# Altium PCB IO BOARD CERES V3.PcbDoc
Units mm, origin at the board's own origin, x right, y up, seen from the top; angles counter-clockwise.
Board outline 82 x 99.2 mm, 2 copper layers (Top Layer, Bottom Layer), stack 1.671 mm thick; 68 components, 45 nets, 223 pads, 57 vias.
Unrouted connection lines stored in the file: 1.
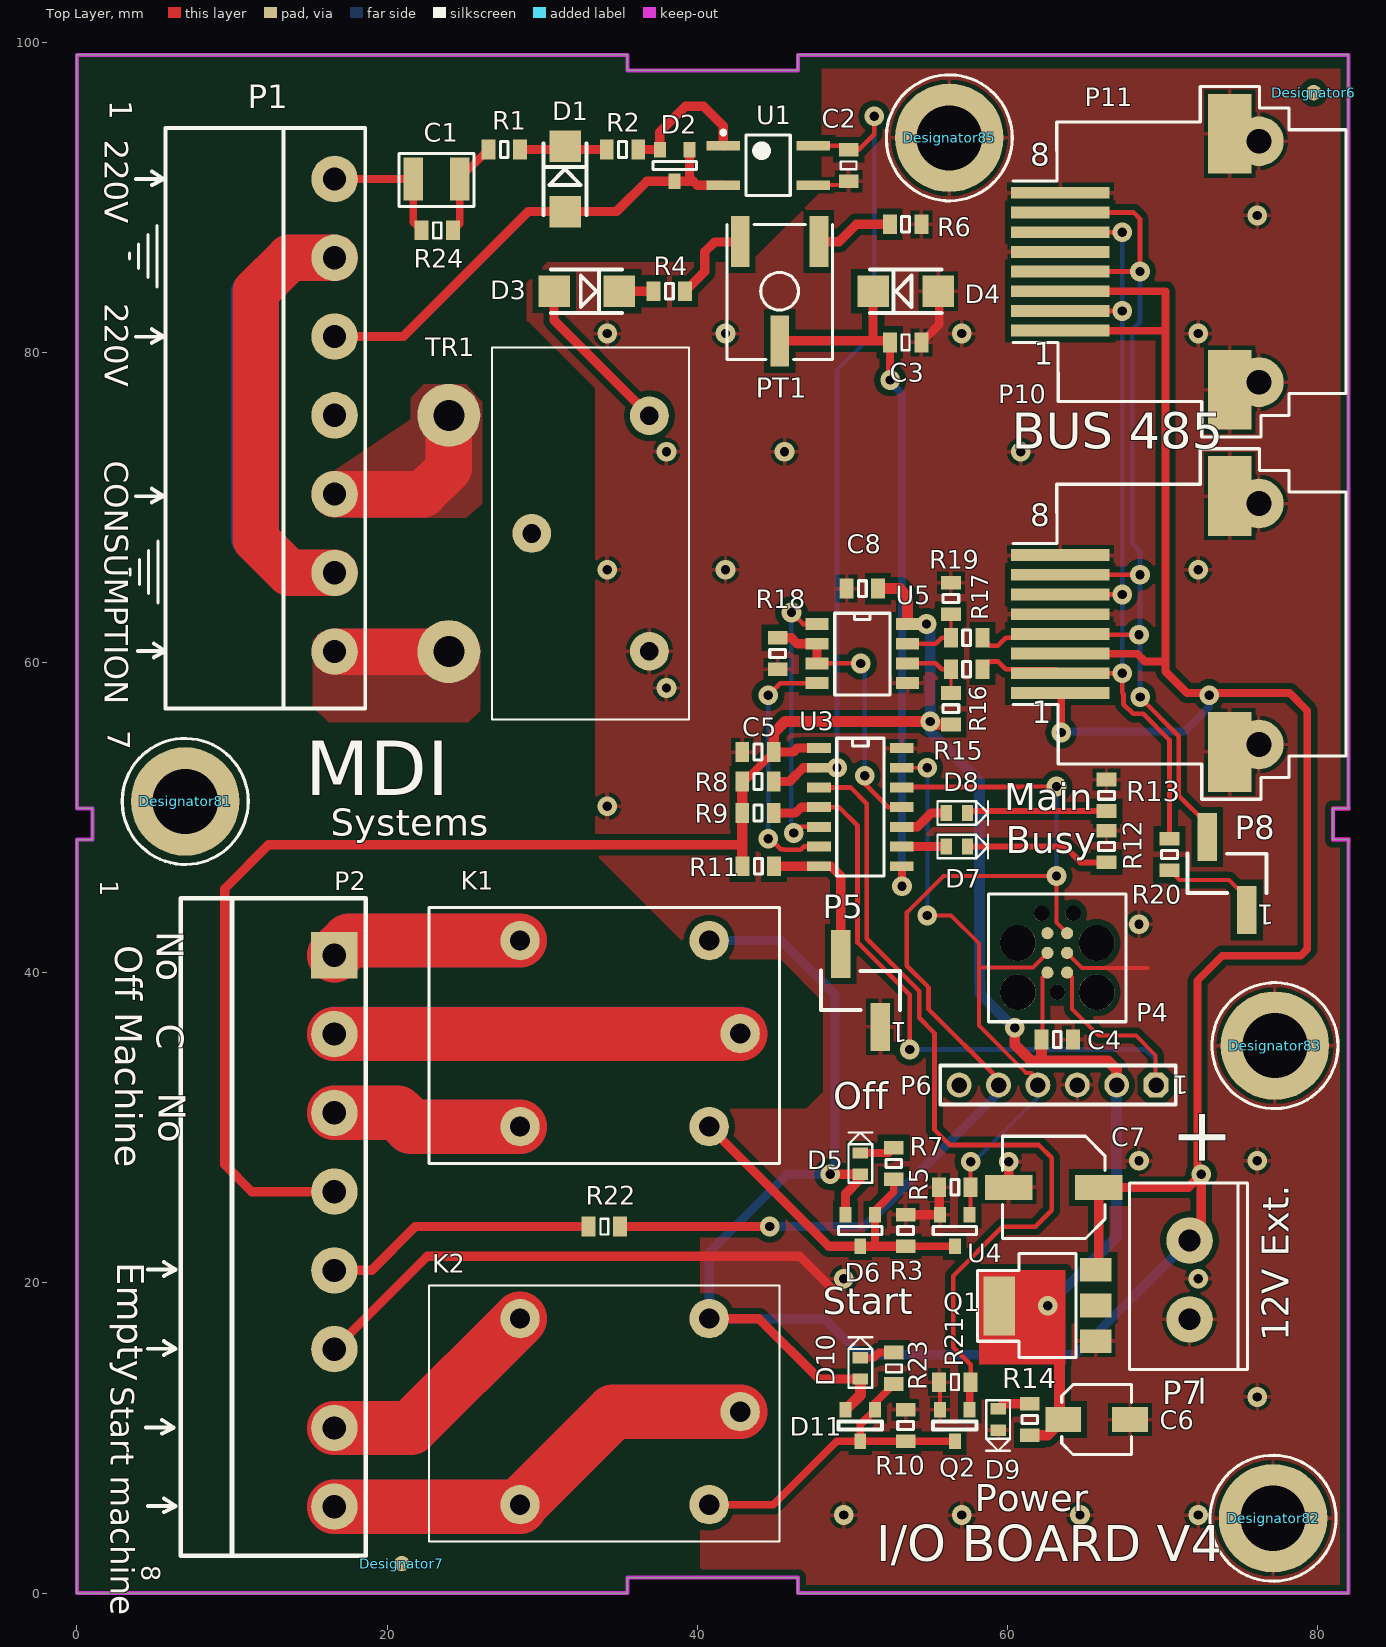
[diagram p0: Top Layer view]
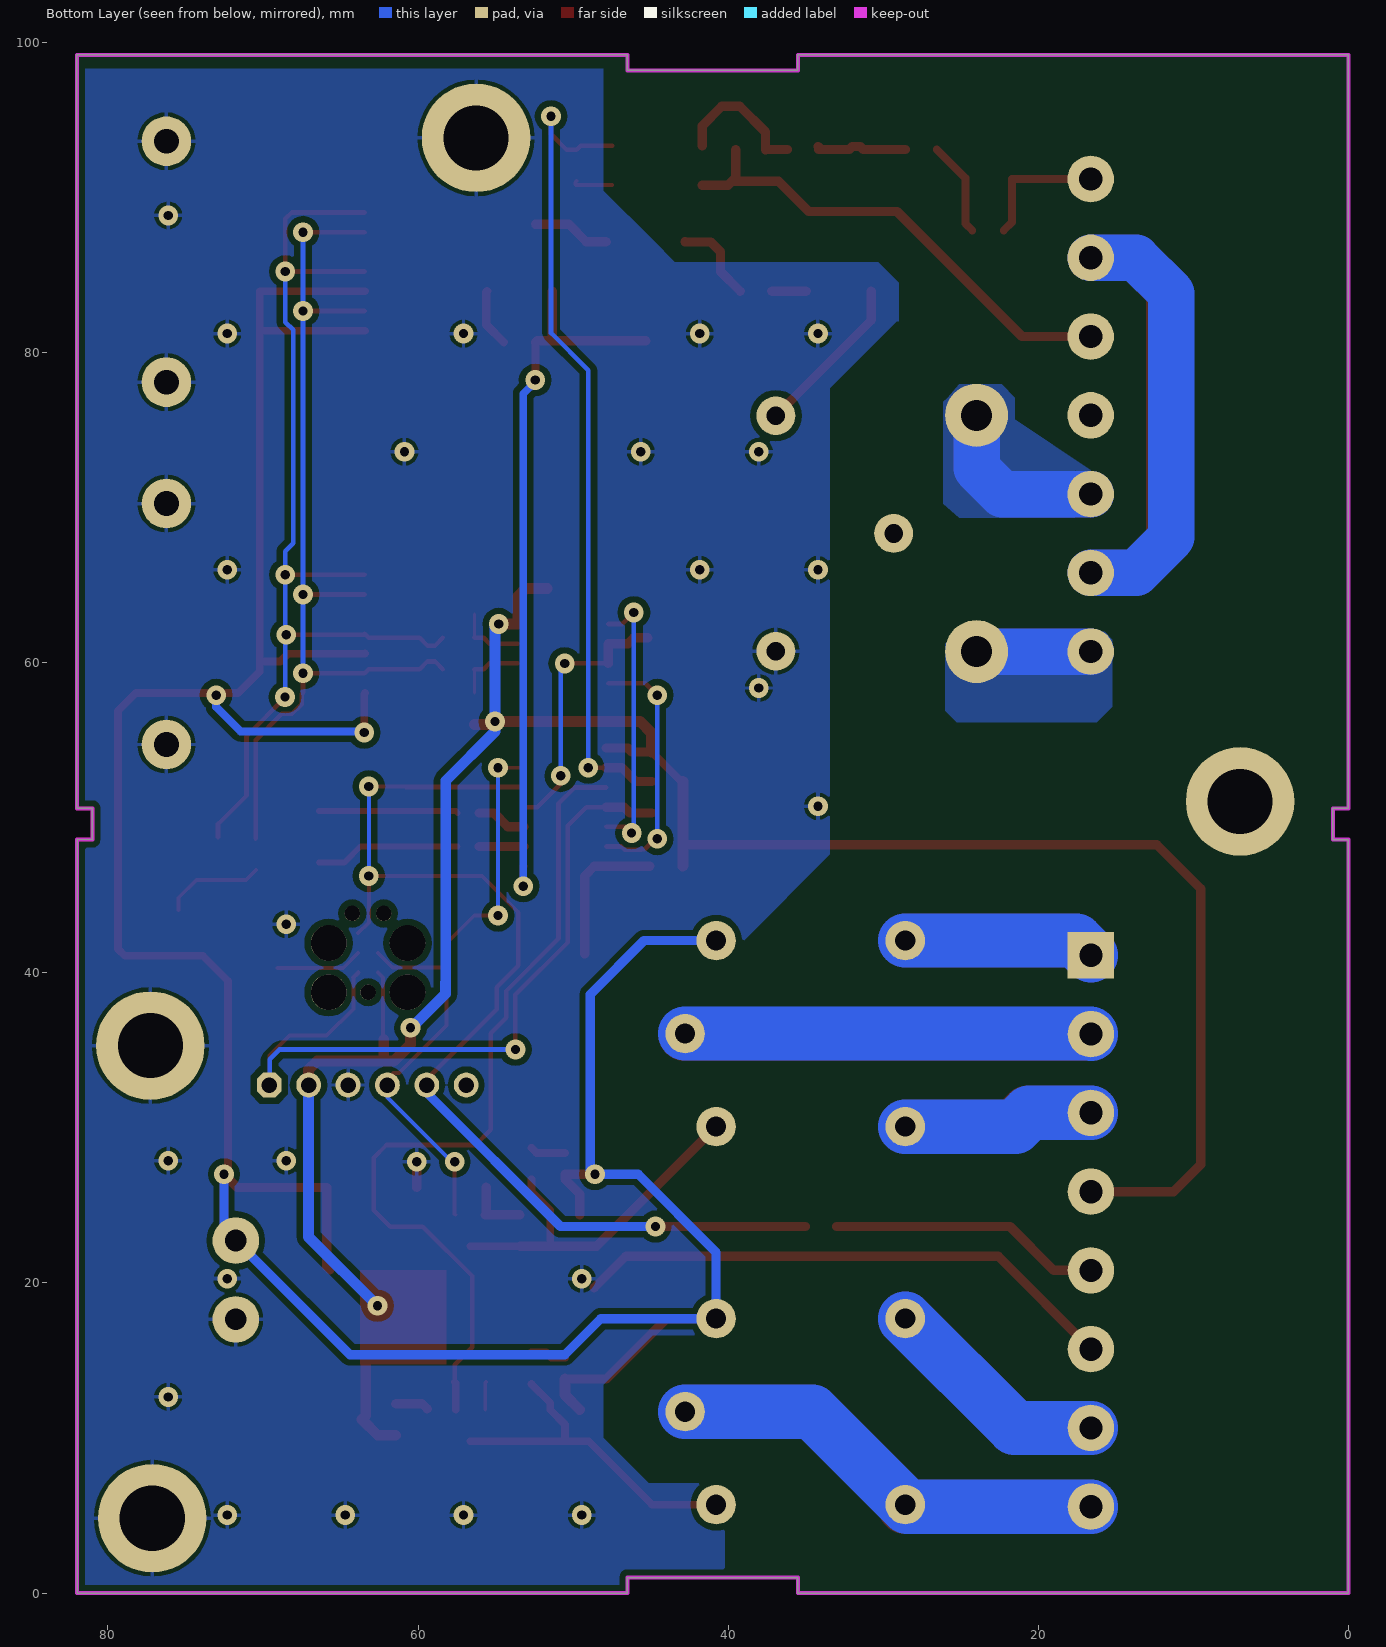
[diagram p1: Bottom Layer view, seen from below]
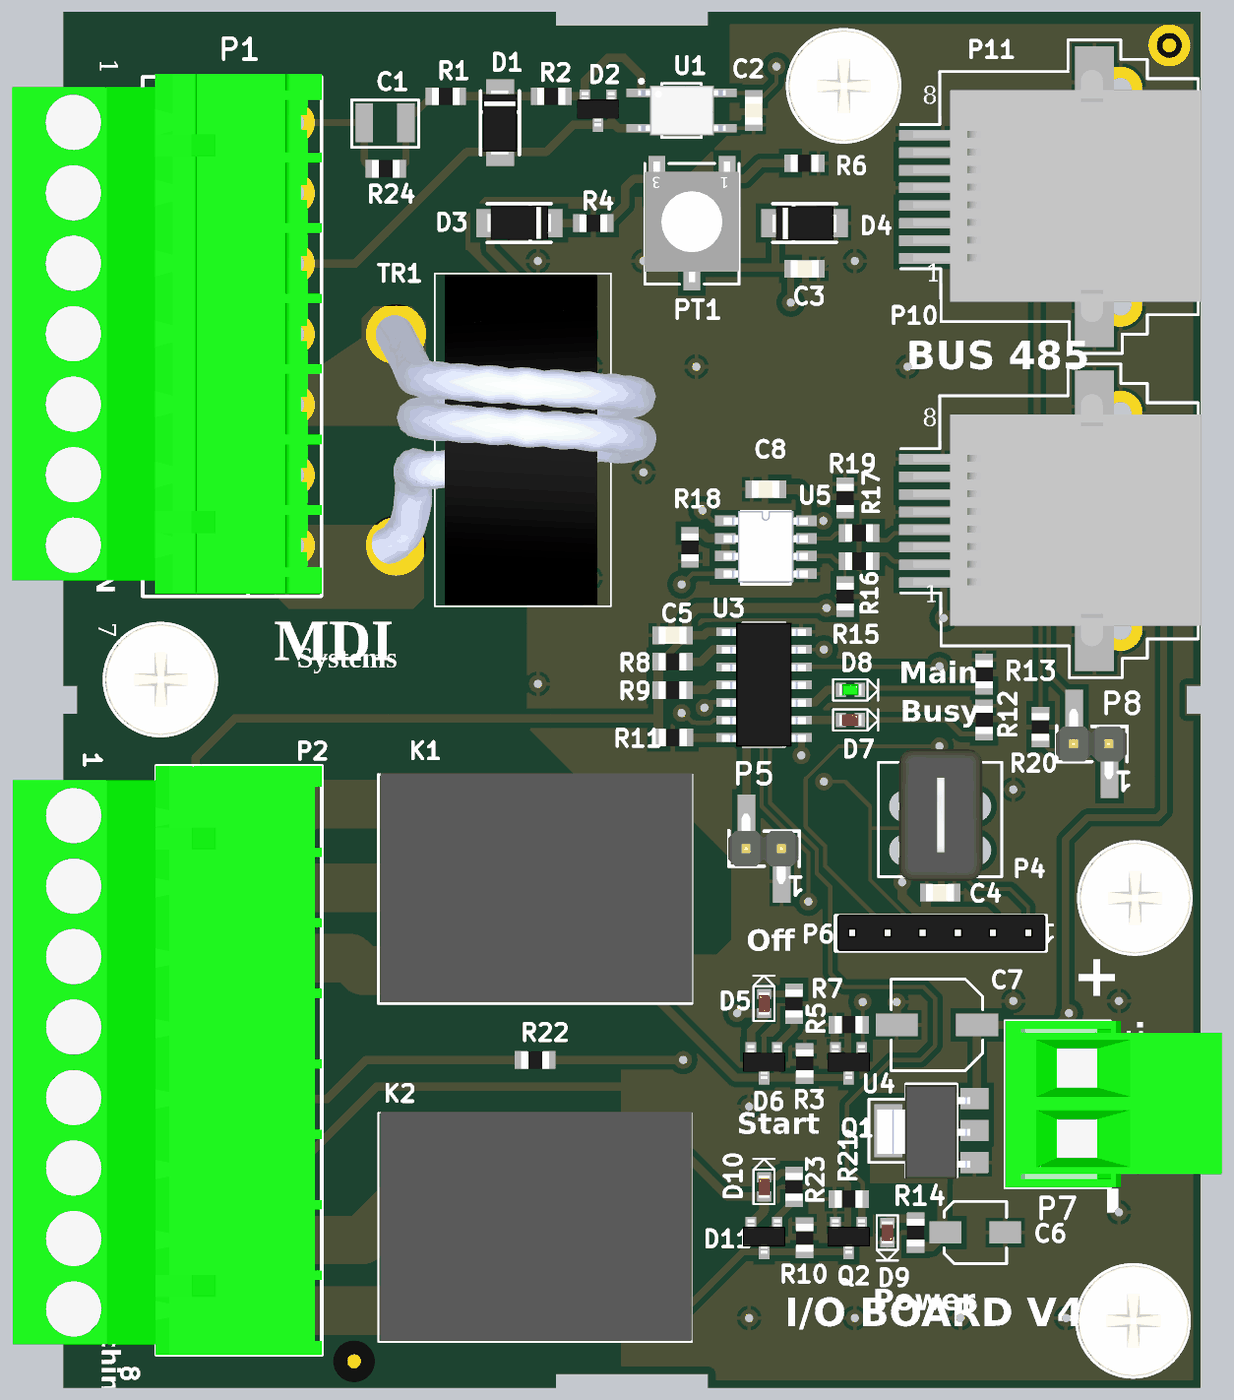
[diagram p2: 3D render of the assembled board from above, using the file's embedded part models]

## Layer stack, top to bottom
Top Solder: solder mask 0.0102, Solder Resist, Dk 3.5
Top Layer: signal copper 0.0356
Dielectric1: core 1.6, FR-4, Dk 4.8
Bottom Layer: signal copper 0.0356
Bottom Solder: solder mask 0.0102, Solder Resist, Dk 3.5

## Board outline
0,0 0,48.6 1,48.6 1,50.6 0,50.6 0,99.2 35.5,99.2 35.5,98.2 46.5,98.2 46.5,99.2 82,99.2 82,50.6 81,50.6 81,48.6 81.996,48.603 81.996,0 46.5,0 46.5,1 35.5,1 35.5,0

## Design rules (kind name [scope] priority, off if disabled: settings)
Clearance Clearance_2 [InPolygon vs InNet('TERRE')] p1: gap=2
Clearance Clearance_1 [InPolygon] p2: gap=0.4
Clearance [All] p3: gap=0.3
DiffPairsRouting [All] p1: maxlimit=0.3 minlimit=0.3 mostfreqgap=0.3 toplayer_minwidth=0.3 toplayer_maxwidth=0.3 toplayer_prefwidth=0.3 bottomlayer_minwidth=0.3 bottomlayer_maxwidth=0.3 bottomlayer_prefwidth=0.3 maxuncoupledlength=12.7
FabricationTestPointUsage TestPointUsage [All] p1: valid=0 allowmultiple=FALSE
FabricationTestpoint Testpoint [All] p1: side=3 testpointundercomponent=TRUE minsize=1.016 maxsize=2.54 preferedsize=1.524 minholesize=0 maxholesize=1.016 preferedholesize=0.813 testpointgrid=0.025 allowsidetop=TRUE allowsidebottom=TRUE usegrid=TRUE gridtolerance=0
HoleSize [All] p1: absolutevalues=TRUE maxlimit=5 minlimit=0.025 maxpercent=80.000 minpercent=20.000
MinimumSolderMaskSliver [All] p1: minsoldermaskwidth=0
PolygonConnect PolygonConnect_1 [All vs (InNet('NetP1_7') or InNet('NetP1_5'))] p1: connectstyle=Direct reliefconductorwidth=0.254 reliefentries=4 polygonreliefangle="90 Angle" airgapwidth=0.254
PolygonConnect [All] p2: connectstyle=Relief reliefconductorwidth=0.254 reliefentries=4 polygonreliefangle="90 Angle" airgapwidth=0.254
RoutingVias [All] p1: holewidth=0.6 width=1.27 viastyle="Through Hole" minholewidth=0.5 minwidth=1.27 maxholewidth=0.9 maxwidth=1.35
SMDNeckDown [All] p1: percent=100.000
SilkToSilkClearance [All] p1: silktosilkclearance=0.1
SilkToSolderMaskClearance SilkscreenOverComponentPads [IsPad] p1: minsilkscreentomaskgap=0.1 clearancetoexposedcopper=TRUE
SolderMaskExpansion [All] p1: expansion=0
Width "Schematic Width Constraint" [InNet('GND')] p1: maxlimit=2 minlimit=0.254 preferedwidth=0.55
Width Width_3 [InNet('+5')] p2: maxlimit=2 minlimit=0.254 preferedwidth=0.7
Width Width_2 [InNet('3.3')] p3: maxlimit=2 minlimit=0.254 preferedwidth=0.7
Width Width_1 [InNet('+12')] p4: maxlimit=2 minlimit=0.254 preferedwidth=0.7
Width [All] p5: maxlimit=6 minlimit=0.254 preferedwidth=0.6
23 further rules are at their usual default settings.

## Classes and differential pairs
component class "U_MCU IO": C4 C5 C6 C7 D7 D8 D9 P4 P5 P6 P7 R8 R9 R11 R12 R13 R14 U3 U4
component class U_IO: C1 C2 C3 D1 D2 D3 D4 D5 D6 D10 D11 K1 K2 P1 P2 PT1 Q1 Q2 R1 R2 R3 R4 R5 R6 R7 R10 R21 R22 R23 R24 TR1 U1
component class "U_RS485 IO": C8 P8 P10 P11 R15 R16 R17 R18 R19 R20 U5
differential pair D: +D_P -D_N
differential pair D1: +D1_P -D1_N

## Components (designator, comment, footprint, x,y, rotation, side; value= is the part's Value field where it differs from the comment)
C1 "150nF" C1210 23.196,91.199 r0 top
C2 "10uF" C0805 49.772,92.075 r270 top
C3 "10uF" C0805 53.446,80.658 r0 top
C4 "100nF" C0805 63.225,35.7 r180 top
C5 "100nF" C0805 43.921,54.242 r0 top
C6 "10uF" KEMET_4 65.765,11.189 r0 top
C7 "100uF" KEMET_63 62.992,26.162 r180 top
C8 "100nF" C0805 50.652,64.783 r180 top
D1 "BZG03C12" sma 31.477,91.199 r90 top
D2 "BAT54S" SOT23 38.549,92.075 r0 top
D3 "1N4007" SMA 32.872,83.96 r0 top
D4 "BZG05C5V1" SMA 53.446,83.96 r180 top
D5 "HSMH-C190" 0603-LEDR 50.525,27.699 r90 top
D6 "BAT54S" SOT23 50.525,23.381 r0 top
D7 "HSMH-C190" 0603-LEDR 56.748,48.146 r0 top
D8 "HSMH-C190" 0603-LEDV 56.748,50.305 r0 top
D9 "HSMH-C190" 0603-LEDR 59.415,11.189 r270 top
D10 "HSMH-C190" 0603-LEDR 50.525,14.491 r90 top
D11 "BAT54S" SOT23 50.525,10.808 r0 top
Designator6 "Comment" mire 79.756,96.774 r90 top
Designator7 "Comment" mire 20.955,1.905 r90 top
Designator81 "Comment" vis42 6.985,51.054 r0 top
Designator82 "Comment" vis42 77.141,4.826 r0 top
Designator83 "Comment" vis42 77.264,35.306 r0 top
Designator85 "Comment" vis42 56.261,93.853 r0 top
K1 "RELAY NAISJS" RELAIG5L 42.778,36.081 r180 top
K2 "RELAY NAISJS" RELAIG5L 42.778,11.697 r180 top
P1 "Header 7" CO7P508-90 16.616,91.199 r270 top locked
P2 "Header 8" "CO8P508 - 90°" 16.6,41.13 r270 top locked
P4 "ICSP1" TC2030 63.225,38.748 r90 top
P5 "CLR" M20_1X2 50.53,38.862 r180 top
P6 "ICSP2" 6SIP100 69.596,32.766 r180 top
P7 "Alim 12V ext." CO2P508 71.755,17.653 r90 top
P8 "EIA-485 TERMINAISON" M20_1X2 74.168,46.413 r180 top
P10 "RJ45" AMPHENOL-RJ45_8 69.829,62.497 r180 top
P11 "RJ45" AMPHENOL-RJ45_8 69.829,85.865 r180 top
PT1 "100K" 3361P 45.318,83.96 r180 top
Q1 "2N7002" SOT23 56.621,23.381 r0 top
Q2 "2N7002" SOT23 56.621,10.808 r0 top
R1 "470" R0805 27.559,93.104 r180 top
R2 "1K" R0805 35.179,93.104 r0 top
R3 "56K" R0805 53.446,23.381 r270 top
R4 "220" R0805 38.206,83.96 r180 top
R5 "56K" R0805 56.621,26.175 r0 top
R6 "220" R0805 53.446,88.278 r180 top
R7 "1K" R0805 52.684,27.699 r90 top
R8 "56K" R0805 43.921,52.337 r180 top
R9 "56K" R0805 43.921,50.305 r180 top
R10 "56K" R0805 53.446,10.808 r270 top
R11 "56K" R0805 43.942,46.876 r180 top
R12 "220" R0805 66.4,48.146 r270 top
R13 "220" R0805 66.4,51.448 r270 top
R14 "270" R0805 61.447,11.189 r270 top
R15 "4.7K" R0805 56.367,57.036 r270 top
R16 "56" R0805 57.383,59.576 r0 top
R17 "56" R0805 57.383,61.608 r0 top
R18 "1K" R0805 45.191,60.592 r90 top
R19 "4.7K" R0805 56.367,64.148 r270 top
R20 "120" R0805 70.464,47.638 r90 top
R21 "56K" R0805 56.621,13.602 r0 top
R22 "1K" R0805 34.015,23.635 r180 top
R23 "1K" R0805 52.684,14.491 r90 top
R24 "1M" R0805 23.241,87.884 r180 top
TR1 "AC1010" TR-AC10XX 33.126,68.339 r90 top
U1 "HCPL-181" OPTO-4PIN 44.577,92.075 r0 top
U3 "PIC16F1824" SO-14 50.525,50.686 r0 top
U4 "LM1117DT-5.0" SOT223 62.59,18.542 r90 top
U5 "ADM4851ARZ" SOIC8 50.652,60.592 r0 top

## Footprints (in the part's own frame and the unit in brackets; to place one, negate y for a bottom-side part, rotate by r counter-clockwise, add the part's x,y. Pads: shape width x height; smd on the part's side, far side on the other; paste and mask are expansions set on the pad)
6SIP100 [mm]
  oct 1.6x1.6 hole 1: 1(0,0)
  round 1.6 hole 1: 2(2.54,0) 3(5.08,0) 4(7.62,0) 5(10.16,0) 6(12.7,0)
  silkscreen extent -1.27,-1.27 13.92,1.27, body extent -1.24,-1.33 13.76,1.27, height 9.62
0603-LEDR [mm]
  rect 0.725x1.016 smd paste+0 mask+0: 1(-0.69,0) 2(0.69,0)
  silkscreen extent -1.24,-0.76 2.01,0.76, body extent -0.8,-0.4 0.8,0.4, height 0.69
0603-LEDV [mm]
  rect 0.725x1.016 smd: 1(-0.69,0) 2(0.69,0)
  silkscreen extent -1.24,-0.76 2.01,0.76, body extent -0.8,-0.4 0.8,0.4, height 0.69
3361P [mm] "Résistance ajustable Bourns"
  rect 1.2x3.3 smd: 1(-2.54,-3.2) 2(0,3.2) 3(2.54,-3.2)
  silkscreen extent -3.4,-4.3 3.4,4.4, body extent -3.4,-4.45 3.4,4.25, height 4.88
AMPHENOL-RJ45_8 [mm]
  rect 6.35x0.76 smd: 1(6.4,4.445) 2(6.4,3.175) 3(6.4,1.905) 4(6.4,0.635) 5(6.4,-0.635) 6(6.4,-1.905) 7(6.4,-3.175) 8(6.4,-4.445)
  round 3.2 hole 1.6: 9(-6.4,7.77) 9(-6.4,-7.77)
  rect 2.8x5.15 smd: 9(-4.524,8.255) 9(-4.524,-8.255)
  silkscreen extent -12.02,-11.3 9.45,11.3, body extent -12.22,-9.14 8.56,9.05, height 11.85
C0805 [mil]
  rect 35x50 smd: 1(-40,0) 2(40,0)
  silkscreen extent -10,-20 10,20, body extent -39,-25 40,25, height 56
C1210 [mm]
  rect 1.27x2.8 smd paste+0 mask+0: 1(-1.5,0)
  rect 1.27x2.8 smd mask+0: 2(1.5,0)
  silkscreen extent -2.41,-1.78 2.41,1.65, body extent -1.52,-1.27 1.52,1.27, height 1
CO2P508 [mm]
  round 3 hole 1.4: 1(0,0) 2(5.08,0)
  silkscreen extent -3.23,-3.75 8.79,3.86, body extent -3.2,-11.79 8.78,3.86, height 22.32
CO7P508-90 [mm]
  round 3 hole 1.5: 1(0,0) 2(5.08,0) 3(10.16,0) 4(15.24,0) 5(20.32,0) 6(25.4,0) 7(30.48,0)
  silkscreen extent -3.3,-10.91 34.14,1.98, body extent -3.51,-20.3 33.93,2, height 15.56
"CO8P508 - 90°" [mm]
  rect 3x3 hole 1.5: 1(0,0)
  round 3 hole 1.5: 2(5.08,0) 3(10.16,0) 4(15.24,0) 5(20.32,0) 6(25.4,0) 7(30.48,0) 8(35.56,0)
  silkscreen extent -3.68,-9.91 38.73,2.03, body extent -3.7,-20.27 38.76,2.03, height 15.39
KEMET_4 [mm] "Aluminum Electrolytic Capacitor, Body 4,30x4,30x6,10mm, IPC Medium Density"
  rect 2.3x1.6 smd: 1(-2.15,0) 2(2.15,0)
  silkscreen extent -2.25,-2.25 2.25,2.25, body extent -2.6,-2.25 2.6,2.25, height 4.7
KEMET_63 [mm] "Aluminum Electrolytic Capacitor, Body 6,50x6,50x6,10mm, IPC Medium Density"
  rect 3.05x1.6 smd: 1(-2.9,0) 2(2.9,0)
  silkscreen extent -3.3,-3.3 3.3,3.3, body extent -3.49,-3.39 3.51,3.41, height 8.8
M20_1X2 [mm] "Connecteur Harwin_M20-8770242"
  rect 1.27x3.1 smd: 1(-1.27,2.35) 2(1.27,-2.35)
  silkscreen extent -2.54,-1.3 2.54,1.27, body extent -2.5,-2.54 2.58,2.54, height 9.95
mire [mm]
  round 1 smd paste-1 mask+1: Mire(0,0)
OPTO-4PIN [mm] "SOP, 4-Leads, Body 3,60x4,40mm, Pitch 2,54mm, IPC Medium Density"
  rect 2.15x0.6 smd: 1(-2.9,1.27) 2(-2.9,-1.27) 3(2.9,-1.27) 4(2.9,1.27)
  silkscreen extent -3.02,-1.95 1.42,2.24, body extent -3.13,-1.8 3.17,1.8, height 2.2
R0805 [mil]
  rect 35x50 smd: 1(-40,0) 2(40,0)
  silkscreen extent -10,-20 10,20, body extent -39,-24 39,25, height 20
RELAIG5L [mm]
  round 2.54 hole 1.3: 1(0,0) 2(2,-6) 3(14.2,-6) 4(14.2,6) 5(2,6)
  silkscreen extent -2.54,-8.13 20.07,8.38, body extent -2.57,-8.2 19.93,8.3, height 19
sma [mil]
  rect 80x80 smd: 1(-82.7,0) 2(82.7,0)
  silkscreen extent -91,-55 90,55, body extent -91,-47 91,49, height 86
SMA [mil]
  rect 80x80 smd: 1(-82.7,0) 2(82.7,0)
  silkscreen extent -91,-55 90,55, body extent -91,-47 91,49, height 86
SO-14 [mil]
  rect 60x25 smd: 1(-105,150) 2(-105,100) 3(-105,50) 4(-105,0) 5(-105,-50) 6(-105,-100) 7(-105,-150) 8(105,-150) 9(105,-100) 10(105,-50) 11(105,0) 12(105,50) 13(105,100) 14(105,150)
  silkscreen extent -60,-175 60,175, body extent -120,-176 119,176, height 69
SOIC8 [mil]
  rect 59.1x30.3 smd: 1(-115,75) 2(-115,25) 3(-115,-25) 4(-115,-75) 5(115,-75) 6(115,-25) 7(115,25) 8(115,75)
  silkscreen extent -70,-105 70,102, body extent -120,-100 119,103, height 69
SOT23 [mil]
  rect 30x40 smd: 1(37.5,40) 2(-37.5,40) 3(0,-40)
  silkscreen extent -55,-10 55,10, body extent -60,-45 60,53, height 47
SOT223 [mil]
  rect 60x80 smd: 1(-90.6,-122.5) 2(0,-122.5) 3(90.6,-122.5)
  rect 150x80 smd: 4(-0.6,122.5)
  silkscreen extent -132,-73 132,178, body extent -137,-111 129,154, height 73
TC2030 [mil]
  round 31 smd paste-39.37: 1(50,-25) 2(50,25) 3(100,-25) 4(100,25) 5(150,-25) 6(150,25)
  round 39 hole 39.37 unplated: 7(0,0) 8(200,-40) 9(200,40)
  round 90.55 hole 90.55 unplated: 10(0,-100) 11(125,-100) 12(0,100) 13(125,100)
  silkscreen extent -75,-175 250,175, body extent -87,-120 287,116, height 626
TR-AC10XX [mm]
  round 4.064 hole 2 mask+0.127: 1(7.62,9.144) 2(-7.62,9.144)
  round 2.5 hole 1.2 mask+0.127: 3(-7.593,-3.796) 4(7.593,-3.796) 5(0,3.796)
  silkscreen extent -11.99,-6.35 11.99,6.35, body extent -11.91,-9.63 11.89,10.89, height 29.76
vis42 [mm]
  round 7 hole 4.2: 1(0,0)
  silkscreen extent -4.06,-4.06 4.06,4.06, body extent -3.97,-4 4.03,4, height 3.09

## Part data
C1: library part Cap, "Capacitor"
C2 C3 C7: library part "Cap Pol 100uF", "Polarized Capacitor"
C4 C5 C8: library part "Cap 0805 100nF", "Capacitor"
C6: library part "Cap Pol1", "Polarized Capacitor"
D1: library part DZ
D2 D6 D11: "Schottky Barrier Double Diode"
D3: library part D
D4: "Silicon Zener Diode (3W)"
D5 D7 D8 D9 D10: "Surface Mount Chip LED, Red"
P1: "Header, 7-Pin"
P2: "Header, 8-Pin"
P4 P6: library part "Header 6", "Header, 6-Pin"
P5 P7 P8: library part "Header 2", "Header, 2-Pin"
P10 P11: library part "Header 8", "Header, 8-Pin"
PT1: library part RV
Q1 Q2: "N-channel Enhancement Mode Field-effect Transistor"
R1 R24: library part "Resistor 0805 470", "Resistor"
R2: library part Res2, "Resistor"
R3 R5 R8 R9 R10 R11 R21: library part "Resistor 0805 56K", "Resistor"
R4 R6 R12 R13: library part "Resistor 0805 220", "Resistor"
R7 R14 R18 R22 R23: library part "Resistor 0805 1K", "Resistor"
R15 R19: library part "Resistor 0805 4.7K", "Resistor"
R16 R17: library part "Resistor 0805 56", "Resistor"
R20: library part "Resistor 0805 120", "Resistor"
U1: library part Optoisolator1, "4-Pin Phototransistor Optocoupler"
U3: library part PIC16(L)F1824, "14 Pin Flash Microcontrollers with XLP Technology"
U4: "800mA Low-Dropout Linear Regulator, 3-pin TO-252"
U5: library part MAX485ESA, "Low-Power, Slew-Rate-Limited RS-485/RS-422 Transceiver"

## Free pads (board coordinates)
  round 6 on Top Paste: 1(-53.976,-74.879) 1(-53.976,45.121) 1(-53.976,165.121) 1(-18.941,-99.379) 1(-18.941,189.621) 1(101.059,-99.379) 1(101.059,189.621) 1(136.024,-74.879) 1(136.024,165.121) 1(136.095,45.121)

## Via types
v1: diameter 1.27, hole 0.6, Top Layer to Bottom Layer, 57 vias

## Nets (pads, with @x,y where several pads share a name; then routed paths per layer and width w, separated by ;. In a path a pad name is that pad's centre, name@x,y a point inside that pad or via, vN(x,y) a via of type N, cw(c..) or ccw(c..) an arc to the next point about the centre after c; other vN are vias at no path point)
+5: C4.2 C5.2 C6.1 C8.1 P2.4 P4.2 P6.2 R8.2 R9.2 R11.2 R14.2 R15.2 U3.1 U4.4 U5.8 | length 163.9
  Top Layer w0.254: C4.2 62.262,35.753 62.262,39.69 P4.2
  Top Layer w0.5: R8.2 43.032,52.337 C5.2
  Top Layer w0.6: P2.4 11.279,25.89 9.525,27.644 9.525,45.425 12.36,48.26 42.905,48.26 ; C5.2 46.207,54.242 46.461,54.496 U3.1
  Top Layer w0.7: R8.2 R9.2 42.905,48.26 42.905,46.897 R11.2 ; C5.2 44.937,55.476 45.675,56.215 v1(55.038,56.215) 55.232,56.02 R15.2 ; C8.1 53.065,64.783 53.573,64.275 U5.8 v1(54.797,62.497) ; U4.4 U4.4@60.144,18.527 ; v1(60.484,36.45) 60.484,35.375 61.545,34.314 62.209,34.314 ; R14.2 62.599,10.173 C6.1 63.373,11.431 63.373,15.298 U4.4@60.144,18.527 ; C4.2 62.209,34.314 ; v1(62.611,18.527) U4.4@60.144,18.527 ; P6.2 67.056,33.761 66.503,34.314 62.209,34.314
  Bottom Layer w0.7: v1(54.797,62.497) 55.038,62.497 v1(55.038,56.215) 55.038,55.57 58.218,52.389 58.218,39.39 58.238,39.37 58.238,38.65 60.437,36.45 v1(60.484,36.45) ; v1(62.611,18.527) 67.056,22.972 P6.2
+12/485: C7.1 D5.1 D6.2 D10.1 D11.2 K1.2 K2.2 P7.2 P10.1 P10.3 P11.1 P11.3 U4.3 | length 215.4
  Top Layer w0.5: P10.1 63.476,58.005 v1(63.476,55.5) ; P10.3 63.441,60.58 68.392,60.58 68.888,60.084 70.21,60.084 ; P11.1 70.21,81.42 70.21,60.084 ; P11.3 70.21,83.96 70.21,81.42 ; v1(72.517,27.009) 72.263,27.263 72.263,39.497 73.875,41.109 78.921,41.109 79.354,41.542 79.354,56.909 78.211,58.052 71.591,58.052 70.21,59.433 70.21,60.084
  Top Layer w0.6: K2.2 43.973,17.697 47.869,13.801 D10.1 ; v1(48.585,27.009) D5.1 50.525,26.683 49.573,25.731 D6.2 ; U4.3 65.892,21.034 C7.1 71.67,26.162 v1(72.517,27.009) 72.517,23.495 P7.2
  Top Layer w0.7: D11.2 50.525,12.777 D10.1
  Bottom Layer w0.5: v1(63.476,55.5) 63.546,55.57 71.445,55.57 73.025,57.15 v1(73.025,57.912)
  Bottom Layer w0.6: K1.2 45.422,42.081 48.895,38.608 48.895,27.32 v1(48.585,27.009) 45.805,27.009 40.778,21.982 K2.2 48.216,17.697 50.546,15.367 64.389,15.367 P7.2 ; P7.2@71.7,22.788 72.517,23.604 v1(72.517,27.009)
\M\C\L\R\: P4.1 P6.1 R9.1 U3.4 | length 50.3
  Top Layer w0.254: 64.165,39.713 64.165,37.681 65.892,35.954 68.305,35.954 69.575,34.684 69.575,32.787 P6.1
  Top Layer w0.3: U3.4 49.15,50.686 50.345,49.491 50.345,41.956 53.721,38.579 v1(53.721,35.052) ; P4.1 64.165,39.713
  Top Layer w0.6: R9.1 46.334,50.305 46.715,50.686 U3.4
  Bottom Layer w0.3: v1(53.721,35.052) 68.94,35.052 69.575,34.417 P6.1@69.575,33.16
D1_N: R15.1 R16.1 U5.6 | length 4.5
  Top Layer w0.2: R15.1 R16.1
  Top Layer w0.3: U5.6 55.392,59.957 55.773,59.576 R16.1
D1_P: R17.1 R19.2 U5.7 | length 4.5
  Top Layer w0.2: R17.1 R19.2
  Top Layer w0.3: U5.7 55.392,61.227 55.773,61.608 R17.1
D_N: P10.2 P10.6 P11.2 P11.6 R16.2 R20.2 | length 62.3
  Top Layer w0.3: R16.2 58.907,60.084 59.392,60.084 59.9,59.576 63.175,59.576 P10.2 v1(67.416,59.322) 67.416,58.061 67.495,57.982 67.495,57.336 68.131,56.7 68.777,56.7 70.464,55.013 R20.2 ; P10.6 v1(67.416,64.402) ; P11.2 v1(67.416,82.69) ; P11.6 v1(67.416,87.77)
  Bottom Layer w0.3: v1(67.416,59.322) v1(67.416,64.402) v1(67.416,82.69) v1(67.416,87.77)
D_P: P8.2 P10.4 P10.7 P11.4 P11.7 R17.2 | length 68.3
  Top Layer w0.3: R17.2 58.907,61.1 59.392,61.1 59.9,61.608 63.175,61.608 P10.4 63.476,61.815 v1(68.501,61.815) ; P10.7 v1(68.559,65.672) ; P11.4 v1(68.559,85.23) 68.559,88.63 68.149,89.04 P11.7 ; v1@68.56,57.765 71.064,55.262 71.064,51.435 72.898,49.601 P8.2
  Bottom Layer w0.3: v1(68.559,85.23) 68.559,81.973 68.051,81.465 68.051,67.704 68.559,67.196 v1(68.559,65.672) 68.559,57.806 v1(68.58,57.785)
GND: C2.2 C3.2 C4.1 C5.1 C6.2 C7.2 C8.2 D4.1 D9.2 Designator81.1 Designator82.1 Designator83.1 Designator85.1 P2.6 P4.3 P5.1 P6.3 P7.1 P10.5 P10.8 P10.9 P11.5 P11.8 P11.9 Q1.2 Q2.2 R3.1 R5.1 R6.1 R10.1 R12.1 R13.1 R18.1 R19.1 R21.1 TR1.3 U1.3 U3.14 U4.1 U5.5 | length 54.9
  Top Layer w0.254: U1.3 49.805,90.805 49.844,90.843 49.844,90.987 C2.2 ; R21.1 55.669,13.539 Q2.2 ; P4.3 64.823,40.325 69.056,40.325
  Top Layer w0.55: C3.2 55.605,81.801 55.605,83.902 D4.1
  Top Layer w0.6: P2.6 22.587,21.717 46.609,21.717 48.641,19.685 ; R3.1 Q1.2 55.605,24.461 R5.1 ; C7.2 v1(60.092,27.81)
  other v1: 49.449,5.03 57.069,5.03 64.689,5.03 72.309,5.03 76.119,12.65 49.449,20.27 72.309,20.27 68.499,27.89 76.119,27.89 68.499,43.13 34.209,50.75 38.019,58.37 34.209,65.99 41.829,65.99 72.309,65.99 38.019,73.61 45.639,73.61 60.879,73.61 34.209,81.23 41.829,81.23 57.069,81.23 72.309,81.23 76.119,88.85
NetC1_1: C1.1 P1.1 R24.2 | length 8.6
  Top Layer w0.5: P1.1 C1.1 21.696,88.413 R24.2
NetC1_2: C1.2 R1.2 R24.1 | length 6.2
  Top Layer w0.5: R24.1 24.696,88.323 C1.2 24.696,91.257 R1.2
NetC2_1: C2.1 R8.1 U1.4 U3.2 | length 53.1
  Top Layer w0.3: U1.4 49.518,93.345 C2.1 50.425,93.091 51.422,94.088 v1(51.422,95.247) ; U3.2 v1(49.02,53.226)
  Top Layer w0.6: R8.1 45.953,52.337 46.842,53.226 U3.2
  Bottom Layer w0.3: v1(49.02,53.226) 49.02,78.865 51.422,81.267 v1(51.422,95.247)
NetC3_1: C3.1 D4.2 PT1.2 U3.8 | length 47.1
  Top Layer w0.5: C3.1 52.43,78.253 v1(52.451,78.232) ; U3.8 53.213,46.855 v1(53.213,45.593)
  Top Layer w0.6: PT1.2 51.478,80.76 ; D4.2 51.345,80.892 51.478,80.76 ; C3.1 52.328,80.76 51.478,80.76
  Bottom Layer w0.5: v1(52.451,78.232) 52.451,78.105 53.213,77.343 v1(53.213,45.593)
NetD1_1: D1.1 D2.1 D2.3 P1.3 U1.2 | length 31.5
  Top Layer w0.6: P1.3 21.048,81.039 29.108,89.098 D1.1 34.798,89.098 36.759,91.059 D2.3 39.751,91.059 ; D2.1 39.501,91.309 39.751,91.059 ; U1.2 40.005,90.805 39.751,91.059
NetD1_2: D1.2 R1.1 R2.1 | length 6
  Top Layer w0.6: R1.1 31.282,93.104 D1.2 32.004,93.3 32.2,93.104 R2.1 34.163,93.262 R2.1@34.2,93.3
NetD2_2: D2.2 R2.2 U1.1 | length 9.1
  Top Layer w0.6: R2.2 37.583,93.104 D2.2 37.596,94.233 39.248,95.885 40.407,95.885 41.677,94.615 U1.1
NetD3_1: D3.1 TR1.4 | length 10.6
  Top Layer w0.6: D3.1 30.771,82.083 TR1.4
NetD3_2: D3.2 R4.2 | length 2.2
  Top Layer w0.6: D3.2 R4.2
NetD5_2: D5.2 R7.2 | length 2.3
  Top Layer w0.5: D5.2 52.358,28.389 R7.2
NetD6_1: D6.1 D6.3 K1.5 Q1.3 R3.2 R7.1 | length 25.2
  Top Layer w0.5: D6.3 50.589,22.429 51.478,22.429 D6.1 51.478,24.684 52.684,25.89 R7.1 ; R3.2 Q1.3
  Top Layer w0.6: K1.5@41.179,30.081 K1.5 48.494,22.365 D6.3 R3.2
NetD7_1: D7.1 U3.9 | length 2.9
  Top Layer w0.6: U3.9 D7.1
NetD7_2: D7.2 R12.2 | length 9.4
  Top Layer w0.381: D7.2 63.72,48.146 64.736,47.13 R12.2
NetD8_1: D8.1 U3.10 | length 3.2
  Top Layer w0.6: U3.10 54.208,49.416 55.097,50.305 D8.1
NetD8_2: D8.2 R13.2 | length 9
  Top Layer w0.381: D8.2 57.565,50.432 R13.2
NetD9_1: D9.1 R14.1 | length 2.2
  Top Layer w0.6: D9.1 59.741,12.205 R14.1
NetD10_2: D10.2 R23.2 | length 2.3
  Top Layer w0.5: D10.2 51.406,15.181 51.732,15.507 R23.2
NetD11_1: D11.1 D11.3 K2.5 Q2.3 R10.2 R23.1 | length 22.1
  Top Layer w0.5: K2.5 44.906,5.697 49.001,9.792 D11.3 ; R23.1 51.478,12.269 D11.1 50.525,10.872 D11.3 ; Q2.3 R10.2 D11.3
NetK1_1: K1.1 P2.2 | length 52.4
  Top Layer w3.5: P2.2 K1.1@42.778,36.05
  Bottom Layer w3.5: P2.2 16.631,36.081 K1.1
NetK1_3: K1.3 P2.1 | length 24.7
  Top Layer w3.5: P2.1 17.551,42.081 K1.3
  Bottom Layer w3.5: P2.1 17.551,42.081 K1.3
NetK1_4: K1.4 P2.3 | length 24.7
  Top Layer w3.5: P2.3 20.68,30.97 21.569,30.081 K1.4
  Bottom Layer w3.5: P2.3 20.592,30.97 21.481,30.081 K1.4
NetK2_1: K2.1 K2.4 P2.8 | length 57.4
  Top Layer w3.5: P2.8 K2.4@28.578,5.57 ; K2.4 34.578,11.697 K2.1
  Bottom Layer w3.5: P2.8 28.451,5.57 K2.4 34.578,11.697 K2.1
NetK2_3: K2.3 P2.7 | length 29.8
  Top Layer w3.5: P2.7 21.531,10.65 K2.3
  Bottom Layer w3.5: P2.7 21.531,10.65 K2.3
NetP1_5: P1.5 TR1.1 | length 23
  Top Layer w3: P1.5 22.331,70.879 23.982,72.53 TR1.1
  Bottom Layer w3: P1.5 22.331,70.879 23.982,72.53 TR1.1
NetP1_7: P1.7 TR1.2 | length 14.7
  Top Layer w3: P1.7 TR1.2
  Bottom Layer w3: P1.7 TR1.2
NetP2_5: P2.5 R22.2 | length 17.6
  Top Layer w0.6: P2.5 18.998,20.81 21.823,23.635 R22.2
NetP5_2: P5.2 R11.1 U3.7 | length 9.5
  Top Layer w0.6: R11.1@45.064,46.876 U3.7 48.628,46.876 49.255,46.249 49.255,41.217 P5.2
NetP8_1: P8.1 R20.1 | length 6.5
  Top Layer w0.254: R20.1 71.098,45.988 74.295,45.988 75.438,44.845 P8.1
NetPT1_1: PT1.1 R6.2 | length 5
  Top Layer w0.6: PT1.1 49.153,87.16 50.271,88.278 R6.2
NetPT1_3: PT1.3 R4.1 | length 5.6
  Top Layer w0.6: R4.1 40.492,85.23 40.492,86.5 41.127,87.135 42.753,87.135 PT1.3
NetQ2_1: Q2.1 R21.2 U3.3 | length 55.3
  Top Layer w0.3: U3.3 49.898,51.956 50.945,50.909 50.945,42.204 54.321,38.828 54.321,37.098 55.307,36.112 55.307,29.885 56.294,28.898 62.034,28.898 62.865,28.067 62.865,24.684 61.803,23.622 59.69,23.622 56.515,20.447 56.515,15.854 57.637,14.732 R21.2
  Top Layer w0.5: Q2.1 57.574,13.539 R21.2
NetR18_2: R18.2 U3.11 U5.2 U5.3 | length 17.7
  Top Layer w0.3: U5.3 v1(50.546,59.957) ; v1(50.8,52.705) 50.8,52.197 52.311,50.686 U3.11
  Top Layer w0.6: R18.2 46.08,61.608 46.461,61.227 U5.2 U5.3
  Bottom Layer w0.3: v1(50.546,59.957) 50.8,59.703 v1(50.8,52.705)
NetU3_5: U3.5 U5.1 | length 18
  Top Layer w0.3: v1(46.08,63.246) 46.829,62.497 U5.1 ; v1(46.228,49.022) 46.622,49.416 U3.5
  Bottom Layer w0.3: v1(46.08,63.246) 46.08,49.17 v1(46.228,49.022)
NetU3_6: U3.6 U5.4 | length 16.4
  Top Layer w0.3: v1(44.577,48.641) 44.704,48.641 45.384,47.961 45.589,47.961 45.613,47.937 46.677,47.937 46.886,48.146 U3.6 ; v1(44.577,57.912) 45.347,58.682 47.726,58.682 U5.4
  Bottom Layer w0.3: v1(44.577,48.641) v1(44.577,57.912)
PGEC1: P4.5 P6.5 R22.1 U3.12 | length 80
  Top Layer w0.254: 53.528,43.9 55.877,46.249 v1(63.175,46.249) ; 60.783,51.956 U3.12 53.256,52.02 v1(63.175,52.02) ; v1@63.185,46.259 v1(63.175,46.249) ; P4.5 63.175,43.243 v1(63.175,46.249)
  Top Layer w0.3: 53.528,43.9 53.528,40.469 54.921,39.077 54.921,37.654 P6.5@59.415,33.16
  Top Layer w0.6: R22.1 v1(44.691,23.635)
  Bottom Layer w0.254: v1(63.175,46.249) v1(63.175,52.02)
  Bottom Layer w0.6: v1(44.691,23.635) 50.813,23.635 59.415,32.237 P6.5@59.415,33.16
PGED1: P4.4 P6.4 Q1.1 R5.2 U3.13 | length 41.3
  Top Layer w0.254: U3.13 v1(54.843,53.226) ; v1(54.843,43.701) 56.375,43.701 58.166,41.91 58.166,40.346 ; Q1.1 57.637,24.461 R5.2 v1(57.637,27.813) ; P6.4@61.955,32.766 61.955,33.16 61.578,33.537 61.223,33.537 58.166,36.594 58.166,40.346 ; P4.4 61.648,40.346 58.166,40.346
  Bottom Layer w0.254: v1(54.843,43.701) v1(54.843,53.226) ; v1(57.637,27.813) 57.817,27.813 61.976,31.972 P6.4
TERRE: P1.2 P1.6 | length 56
  Top Layer w3: P1.6 13.695,65.799 11.536,67.958 11.536,83.96 13.695,86.119 P1.2
  Bottom Layer w3: P1.6 13.695,65.799 11.409,68.085 11.409,83.833 13.695,86.119 P1.2
pads on no net: Designator6.Mire Designator7.Mire P1.4 P4.6 P4.7 P4.8 P4.9 P4.10 P4.11 P4.12 P4.13 P6.6 TR1.5 U4.2
copper on no net: | length 4
  Top Layer w0.254: 82,48.6 81,48.6 81,50.6 82,50.6

## Polygon pours and split planes (outlines as drawn)
NetP1_7 on Top Layer "Mid-Layer 1-No Net" (solid, remove dead copper, pour order 10): 15.854,61.989 15.727,61.989 15.219,61.481 15.219,59.068 15.219,57.163 16.235,56.147 25.252,56.147 26.014,56.909 26.014,61.227 25.252,61.989
NetP1_5 on Top Layer "Mid-Layer 1-No Net" (solid, remove dead copper, pour order 8): 17.632,72.403 16.616,71.895 16.616,72.403 21.513,75.705 21.513,77.102 22.367,77.955 23.764,77.955 25.096,77.955 25.842,77.102 26.141,76.848 26.141,70.244 25.096,69.355 17.632,69.355
GND on Top Layer "Mid-Layer 1-No Net" (solid, remove dead copper, pour order 12): 81.697,98.533 81.473,98.308 48.042,98.308 48.042,90.443 44.867,87.268 43.432,85.833 34.618,85.833 30.334,85.833 29.064,84.563 28.996,84.495 28.996,82.023 29.112,82.023 33.417,77.718 33.437,77.697 33.437,64.878 33.437,47.641 40.211,40.867 43.196,40.867 45.383,40.867 48.042,38.208 48.149,38.102 48.149,33.268 48.149,32.332 47.04,31.223 40.846,31.223 40.211,30.588 40.211,17.603 41.196,16.618 44.867,16.618 48.042,13.443 48.042,10.268 48.042,10.027 45.108,7.093 41.164,7.093 40.846,7.093 40.211,6.458 40.211,0.108 81.697,0.108
NetP1_7 on Bottom Layer "Mid-Layer 1-No Net" (solid, remove dead copper, pour order 9): 15.854,61.989 15.727,61.989 15.219,61.481 15.219,59.068 15.219,57.163 16.235,56.147 25.252,56.147 26.014,56.909 26.014,61.227 25.252,61.989
NetP1_5 on Bottom Layer "Mid-Layer 1-No Net" (solid, remove dead copper, pour order 7): 17.632,72.403 16.616,71.895 16.616,72.403 21.513,75.705 21.513,77.102 22.367,77.955 23.764,77.955 25.096,77.955 25.842,77.102 26.141,76.848 26.141,70.244 25.096,69.355 17.632,69.355
GND on Bottom Layer "Mid-Layer 1-No Net" (solid, remove dead copper, pour order 11): 81.697,98.533 81.473,98.308 48.042,98.308 48.042,90.443 44.867,87.268 43.432,85.833 34.618,85.833 30.334,85.833 29.064,84.563 28.996,84.495 28.996,82.023 29.112,82.023 33.417,77.718 33.437,77.697 33.437,64.878 33.437,47.641 40.211,40.867 43.196,40.867 45.383,40.867 48.042,38.208 48.149,38.102 48.149,33.268 48.149,32.332 47.04,31.223 40.846,31.223 40.211,30.588 40.211,17.603 41.196,16.618 44.867,16.618 48.042,13.443 48.042,10.268 48.042,10.027 45.108,7.093 41.164,7.093 40.846,7.093 40.211,6.458 40.211,0.108 81.697,0.108

## Keep-outs
Keep-Out Layer:
  the board outline again, w0.254

## Other copper
Top Layer:
  rectangle net +5: 58.166,14.732 63.754,20.843
  text "CUIVRE TOP" at 178.989,-131.114 h4
Bottom Layer:
  text "CUIVRE BOTTOM" at -52.532,-131.749 h4

## Silkscreen, mask and mechanical layers (free items; w line width, h text height)
Top Overlay:
  lines w0.199: 3.381,86.027 3.381,86.424 ; 3.429,65.659 3.429,66.056 ; 3.977,85.432 3.977,87.02 ; 4.024,65.063 4.024,66.652 ; 4.572,84.836 4.572,87.616 ; 4.62,64.468 4.62,67.247 ; 5.167,84.24 5.167,88.211 ; 5.215,63.872 5.215,67.843
  lines w0.254: 3.81,70.739 5.588,70.739 ; 3.81,81.026 5.588,81.026 ; 3.81,91.199 5.588,91.199 ; 3.937,60.746 5.715,60.746 ; 4.466,10.677 6.244,10.677 ; 4.593,5.615 6.371,5.615 ; 4.593,15.757 6.371,15.757 ; 4.593,20.855 6.371,20.855 ; 4.826,70.345 5.588,70.739 ; 4.826,71.234 5.588,70.739 ; 4.826,80.632 5.588,81.026 ; 4.826,81.521 5.588,81.026 ; 4.826,90.805 5.588,91.199 ; 4.826,91.694 5.588,91.199 ; 4.953,60.352 5.715,60.746 ; 4.953,61.241 5.715,60.746 ; 5.482,10.283 6.244,10.677 ; 5.482,11.172 6.244,10.677 ; 5.609,5.221 6.371,5.615 ; 5.609,6.11 6.371,5.615 ; 5.609,15.363 6.371,15.757 ; 5.609,16.252 6.371,15.757 ; 5.609,20.461 6.371,20.855 ; 5.609,21.35 6.371,20.855
  text "220V" at 1.27,93.726 h2.6 r270
  text "220V" at 1.27,83.185 h2.6 r270
  text "CONSUMPTION" at 1.27,73.025 h2.6 r270
  text "BUS 485" at 60.304,73.038 h4
  text "MDI" at 14.732,50.292 h6
  text "Main" at 59.793,49.911 h3
  text "Systems" at 16.383,48.26 h3
  text "Busy" at 59.9,47.13 h3
  text "No" at 4.572,42.672 h3 r270
  text "Off Machine" at 1.884,41.796 h3 r270
  text "C" at 4.572,36.703 h3 r270
  text "No" at 4.699,32.258 h3 r270
  text "Off" at 48.786,30.607 h3
  text "+" at 75.239,27.362 h6 r90
  text "Empty" at 2.032,21.336 h3 r270
  text "Start" at 48.112,17.412 h3
  text "12V Ext." at 78.74,16.256 h3 r90
  text "Start machine" at 1.651,13.335 h2.6 r270
  text "-" at 75.67,11.873 h8 r90
  text "Power" at 57.912,4.699 h3
  text "I/O BOARD V4" at 51.541,1.283 h4
  text "PLAN D'EQUIPEMENT TOP" at 179.116,-131.114 h4
Bottom Overlay:
  text "PLAN D'EQUIPEMENT BOTTOM" at -35.514,-131.749 h4
  text ".Layer_Name" at 1.189,-140.639 h2
Top Paste:
  lines w0.3: -58.441,-94.379 -58.441,184.621 -58.386,185.666 -58.223,186.7 -57.952,187.711 -57.577,188.688 -57.101,189.621 -56.531,190.499 -55.872,191.312 -55.132,192.052 -54.319,192.711 -53.441,193.281 -52.508,193.756 -51.531,194.132 -50.52,194.402 -49.486,194.566 -48.441,194.621 130.559,194.621 131.604,194.566 132.638,194.402 133.649,194.132 134.626,193.756 135.559,193.281 136.437,192.711 137.25,192.052 137.99,191.312 138.649,190.499 139.219,189.621 139.694,188.688 140.07,187.711 140.34,186.7 140.504,185.666 140.559,184.621 140.559,-94.379 140.504,-95.424 140.34,-96.458 140.07,-97.469 139.694,-98.446 139.219,-99.379 138.649,-100.257 137.99,-101.07 137.25,-101.81 136.437,-102.469 135.559,-103.039 134.626,-103.514 133.649,-103.89 132.638,-104.16 131.604,-104.324 130.559,-104.379 -48.441,-104.379 -49.486,-104.324 -50.52,-104.16 -51.531,-103.89 -52.508,-103.514 -53.441,-103.039 -54.319,-102.469 -55.132,-101.81 -55.872,-101.07 -56.531,-100.257 -57.101,-99.379 -57.577,-98.446 -57.952,-97.469 -58.223,-96.458 -58.386,-95.424 -58.441,-94.379
  text "PATE A BRASER TOP" at 179.37,-131.368 h4
Bottom Paste:
  text "PATE A BRASER BOTTOM" at -35.768,-131.749 h4
Top Solder:
  text "VERNIS EPARGNE TOP" at 179.116,-131.368 h4
Bottom Solder:
  text "VERNIS EPARGNE BOTTOM" at -39.705,-132.003 h4
Fond de plan Bottom:
  circle w0.127: c36.442,-106.349 r2
  circle w0.127: c36.442,-106.349 r3
  lines w0.127: -128.351,-79.425 -123.271,-79.425 ; -128.351,-8.94 -123.271,-8.94 ; -128.351,61.545 -123.271,61.545 ; -106.304,-144.995 -106.304,-134.989 ; -79.075,-149.91 -79.075,-144.83 ; -79.075,126.95 -79.075,132.03 ; -29.799,-149.91 -29.799,-144.83 ; -29.799,126.95 -29.799,132.03 ; -9.306,-134.989 -9.306,-119.995 ; 19.35,-149.91 19.35,-144.83 ; 19.35,126.95 19.35,132.03 ; 21.702,-139.732 65.863,-139.732 ; 21.702,-134.975 65.863,-134.975 ; 21.702,-130.229 65.863,-130.229 ; 21.702,-125.485 65.863,-125.485 ; 21.702,-121.146 65.832,-121.147 ; 32.685,-106.349 42.291,-106.349 ; 36.442,-110.017 36.442,-102.669 ; 36.698,-144.995 36.698,-121.147 ; 43.353,-106.349 45.766,-106.349 ; 46.782,-106.349 59.055,-106.349 ; 51.693,-144.995 51.693,-121.147 ; 68.499,-149.91 68.499,-144.83 ; 68.499,126.95 68.499,132.03 ; 117.775,-149.91 117.775,-144.83 ; 117.775,126.95 117.775,132.03 ; 166.924,-149.91 166.924,-144.83 ; 166.924,126.95 166.924,132.03 ; 216.073,-149.91 216.073,-144.83 ; 216.073,126.95 216.073,132.03 ; 260.269,-79.425 265.349,-79.425 ; 260.269,-8.94 265.349,-8.94 ; 260.269,61.545 265.349,61.545 ; -128.351,-149.91 -128.351,132.03 265.349,132.03 265.349,-149.91 -128.351,-149.91 ; -123.271,-144.83 -123.271,126.95 260.269,126.95 260.269,-144.83 -123.271,-144.83 ; 49.055,-109.349 56.055,-108.349 56.055,-104.349 49.055,-103.349 49.055,-109.349
  lines w0.5: -123.297,-134.989 21.702,-134.989 ; -123.297,-119.995 21.702,-119.995 ; -123.297,-111.252 21.702,-111.252 65.862,-111.252 ; -37.906,-144.995 -37.906,-134.989 ; -23.296,-134.989 -23.296,-119.995 ; -23.296,-124.997 21.702,-124.997 ; -23.198,-130 4.696,-130 21.702,-130 ; 4.696,-134.989 4.696,-119.995 ; 21.702,-144.995 21.702,-90.979 ; 21.702,-121.146 65.578,-121.146 ; 21.702,-116.416 65.578,-116.416 ; 21.702,-101.446 65.862,-101.446 ; 36.698,-121.147 36.698,-116.466 ; 51.693,-121.147 51.693,-116.457 ; -123.297,-144.995 65.863,-144.98 65.862,-90.964 -123.297,-90.979 -123.297,-144.995
  text "8" at -103.129,128.601 h1.78
  text "7" at -54.107,128.601 h1.78
  text "6" at -4.577,128.601 h1.78
  text "5" at 44.445,128.601 h1.78
  text "4" at 93.721,128.601 h1.78
  text "3" at 143.013,128.601 h1.78
  text "2" at 192.273,128.601 h1.78
  text "1" at 241.312,128.601 h1.78
  text "A" at -125.176,94.615 h1.78
  text "A" at 263.444,94.615 h1.78
  text "B" at -125.176,24.003 h1.78
  text "B" at 263.444,24.003 h1.78
  text "C" at -125.176,-46.609 h1.78
  text "C" at 263.444,-46.609 h1.78
  text "ECHELLE : 1" at 63.546,-96.951 h3
  text "MDI" at -47.355,-100.507 h8
  text "Systems" at -48.879,-104.571 h4
  text "MODIFICATIONS" at 51.862,-114.731 h3
  text "Ce document est la propriété de MDI System" at -30.307,-114.858 h3
  text "D" at -125.176,-116.713 h1.78
  text "D" at 263.444,-116.713 h1.78
  text "Il ne peut être reproduit ou communiqué sans son autorisation" at -16.718,-118.414 h3
  text "Visa" at 31.923,-119.557 h3
  text "Date" at 46.782,-119.557 h3
  text "Indice" at 61.895,-119.557 h3
  text "NOM" at 0.681,-123.494 h3
  text "DATE" at -12.282,-123.621 h3
  text "SB" at 31.161,-124.129 h3
  text "09/07/14" at 48.62,-124.32 h3
  text "2" at 59.542,-124.32 h3
  text "DESIGNATION : I/O BOARD" at -25.363,-124.764 h4
  text "Etablie" at 16.937,-128.32 h3
  text "13/09/13" at -12.028,-128.574 h2.5
  text "SB" at 31.034,-128.574 h3
  text "19/12/14" at 48.493,-128.765 h3
  text "3" at 59.415,-128.765 h3
  text "SB" at -0.471,-128.955 h3
  text "Vérifiée" at 17.445,-133.4 h3
  text "SB" at 30.907,-133.4 h3
  text "10/04/15" at 48.366,-133.591 h3
  text "4" at 59.436,-133.604 h3
  text "MATIERE :" at 18.325,-137.972 h3
  text "FEUILLE" at -110.825,-138.353 h3
  text "N°" at -39.197,-141.655 h6
  text "1/1" at -113.492,-142.798 h1.3
  text "8" at -103.129,-148.259 h1.78
  text "7" at -54.107,-148.259 h1.78
  text "6" at -4.577,-148.259 h1.78
  text "5" at 44.445,-148.259 h1.78
  text "4" at 93.721,-148.259 h1.78
  text "3" at 143.013,-148.259 h1.78
  text "2" at 192.273,-148.259 h1.78
  text "1" at 241.312,-148.259 h1.78
Fond de plan:
  circle w0.127: c100.555,-106.349 r2
  circle w0.127: c100.555,-106.349 r3
  lines w0.127: -128.351,-79.425 -123.271,-79.425 ; -128.351,-8.94 -123.271,-8.94 ; -128.351,61.545 -123.271,61.545 ; -79.075,-149.91 -79.075,-144.83 ; -79.075,126.95 -79.075,132.03 ; -29.926,-149.91 -29.926,-144.83 ; -29.926,126.95 -29.926,132.03 ; 19.223,-149.91 19.223,-144.83 ; 19.223,126.95 19.223,132.03 ; 68.499,-149.91 68.499,-144.83 ; 68.499,126.95 68.499,132.03 ; 71.135,-139.732 115.295,-139.732 ; 71.135,-134.975 115.295,-134.975 ; 71.135,-130.229 115.295,-130.229 ; 71.135,-125.485 115.295,-125.485 ; 71.166,-121.147 115.295,-121.146 ; 77.942,-106.349 90.216,-106.349 ; 85.304,-144.995 85.304,-121.147 ; 91.232,-106.349 93.645,-106.349 ; 94.706,-106.349 104.313,-106.349 ; 100.299,-144.995 100.299,-121.147 ; 100.555,-110.017 100.555,-102.669 ; 117.648,-149.91 117.648,-144.83 ; 117.648,126.95 117.648,132.03 ; 146.303,-134.989 146.303,-119.995 ; 166.797,-149.91 166.797,-144.83 ; 166.797,126.95 166.797,132.03 ; 216.073,-149.91 216.073,-144.83 ; 216.073,126.95 216.073,132.03 ; 243.301,-144.995 243.301,-134.989 ; 260.269,-79.425 265.349,-79.425 ; 260.269,-8.94 265.349,-8.94 ; 260.269,61.545 265.349,61.545 ; -128.351,-149.91 265.349,-149.91 265.349,132.03 -128.351,132.03 -128.351,-149.91 ; -123.271,-144.83 260.269,-144.83 260.269,126.95 -123.271,126.95 -123.271,-144.83 ; 80.942,-108.349 80.942,-104.349 87.942,-103.349 87.942,-109.349 80.942,-108.349
  lines w0.5: 71.136,-111.252 115.295,-111.252 260.294,-111.252 ; 71.136,-101.446 115.295,-101.446 ; 71.419,-121.146 115.295,-121.146 ; 71.419,-116.416 115.295,-116.416 ; 85.304,-121.147 85.304,-116.457 ; 100.299,-121.147 100.299,-116.466 ; 115.295,-144.995 115.295,-90.979 ; 115.295,-134.989 260.294,-134.989 ; 115.295,-130 132.301,-130 160.195,-130 ; 115.295,-124.997 160.294,-124.997 ; 115.295,-119.995 260.294,-119.995 ; 132.301,-134.989 132.301,-119.995 ; 160.294,-134.989 160.294,-119.995 ; 179.094,-144.995 179.094,-134.989 ; 71.135,-144.98 71.135,-90.964 260.294,-90.979 260.294,-144.995 71.135,-144.98
  text "1" at -104.314,128.601 h1.78
  text "2" at -55.276,128.601 h1.78
  text "3" at -6.016,128.601 h1.78
  text "4" at 43.276,128.601 h1.78
  text "5" at 92.552,128.601 h1.78
  text "6" at 141.574,128.601 h1.78
  text "7" at 191.104,128.601 h1.78
  text "8" at 240.126,128.601 h1.78
  text "A" at -126.446,94.615 h1.78
  text "A" at 262.174,94.615 h1.78
  text "B" at -126.446,24.003 h1.78
  text "B" at 262.174,24.003 h1.78
  text "C" at -126.446,-46.609 h1.78
  text "C" at 262.174,-46.609 h1.78
  text "ECHELLE : 1" at 73.325,-97.078 h3
  text "MDI" at 174.895,-99.745 h8
  text "Systems" at 176.673,-104.063 h4
  text "MODIFICATIONS" at 85.009,-114.858 h3
  text "Ce document est la propriété de MDI System" at 167.305,-114.858 h3
  text "D" at -126.446,-116.713 h1.78
  text "D" at 262.174,-116.713 h1.78
  text "Il ne peut être reproduit ou communiqué sans son autorisation" at 153.716,-118.414 h3
  text "Indice" at 75.103,-119.557 h3
  text "Date" at 90.216,-119.557 h3
  text "Visa" at 105.075,-119.557 h3
  text "NOM" at 136.317,-123.494 h3
  text "DATE" at 149.28,-123.621 h3
  text "2" at 76.962,-124.079 h3
  text "09/07/14" at 88.244,-124.066 h3
  text "SB" at 106.024,-124.32 h3
  text "DESIGNATION : I/O BOARD" at 162.361,-124.764 h4
  text "Etablie" at 120.061,-128.32 h3
  text "13/09/13" at 149.026,-128.574 h2.5
  text "3" at 76.835,-128.651 h3
  text "19/12/14" at 88.117,-128.638 h3
  text "SB" at 105.897,-128.892 h3
  text "SB" at 137.469,-128.955 h3
  text "Vérifiée" at 119.553,-133.4 h3
  text "4" at 76.835,-133.477 h3
  text "10/04/15" at 88.117,-133.464 h3
  text "SB" at 105.897,-133.718 h3
  text "MATIERE :" at 118.673,-137.972 h3
  text "FEUILLE" at 247.823,-138.353 h3
  text "N°" at 182.037,-141.401 h6
  text "1/1" at 250.49,-142.798 h1.3
  text "1" at -104.314,-148.259 h1.78
  text "2" at -55.276,-148.259 h1.78
  text "3" at -6.016,-148.259 h1.78
  text "4" at 43.276,-148.259 h1.78
  text "5" at 92.552,-148.259 h1.78
  text "6" at 141.574,-148.259 h1.78
  text "7" at 191.104,-148.259 h1.78
  text "8" at 240.126,-148.259 h1.78
Drill Drawing:
  drawing of 250 lines, arcs and shapes, not listed
  text "Spécification du circuit imprimé" at 184.098,116.678 h5
  text "Process de Fabrication : RoHS" at 195.098,113.678 h3
  text "Ep. CI.:" at 233.598,107.678 h3
  text "1,6mm" at 241.598,107.678 h3
  text "Nbre de couches :" at 166.098,107.178 h3
  text "2" at 184.598,107.178 h3
  text "2" at 205.348,106.928 h4
  text "4" at 213.298,106.878 h4
  text "5" at 217.498,106.878 h4
  text "6" at 221.398,106.878 h4
  text "3" at 209.498,106.778 h4
  text "CLASSE :" at 192.098,106.678 h4
  text "X" at 209.098,106.478 h3
  text "Epaiss. cuivre de base" at 195.098,101.178 h3
  text "FINITION :" at 237.098,100.678 h3
  text "MATIERE :" at 168.498,100.178 h3
  text "FR4" at 179.598,100.178 h3
  text "HTg : Tg  140° C" at 168.498,97.478 h3
  text "35µ" at 189.098,97.178 h3
  text "70µ" at 198.598,97.178 h3
  text "105µ" at 207.598,97.178 h3
  text "140µ" at 217.598,97.178 h3
  text "X" at 193.998,96.378 h3
  text "HAL" at 230.598,96.178 h3
  text "X" at 248.598,95.378 h3
  text "Vernis épargne :" at 166.598,91.678 h3
  text "Face Top" at 191.978,91.678 h3
  text "Face Bottom" at 202.978,91.678 h3
  text "NiAu" at 230.598,90.678 h3
  text "X" at 194.398,86.878 h3
  text "X" at 207.498,86.878 h3
  text "NiAu+ Contact" at 230.598,84.678 h3
  text "Couleur :" at 166.598,82.178 h3
  text "Vert" at 179.098,82.178 h3
  text "Noir" at 186.598,82.178 h3
  text "Noir Mat" at 193.098,82.178 h3
  text "Blanc" at 204.098,82.178 h3
  text "Rouge" at 211.598,82.178 h3
  text "Bleu" at 220.598,82.178 h3
  text "Argent" at 230.598,79.678 h3
  text "X" at 180.098,77.378 h3
  text "Sérigraphie :" at 166.598,71.678 h3
  text "Face Top" at 184.098,71.678 h3
  text "Face Bottom" at 195.098,71.678 h3
  text "Couleur :" at 214.598,71.678 h3
  text "Blanc" at 225.598,71.678 h3
  text "Noir" at 233.098,71.678 h3
  text "Jaune" at 240.098,71.678 h3
  text "X" at 186.598,66.878 h3
  text "X" at 227.098,66.878 h3
  text "Symbol" at -120.672,-97.79 h1.83
  text "Hit Count" at -107.823,-97.79 h1.83
  text "Finished Hole Size" at -90.099,-97.79 h1.83
  text "Plated" at -55.92,-97.79 h1.83
  text "Hole Type" at -43.071,-97.79 h1.83
  text "2" at -107.823,-101.6 h1.52
  text "1,400mm (55,12mil)" at -90.099,-101.6 h1.52
  text "PTH" at -55.92,-101.6 h1.52
  text "Round" at -43.071,-101.6 h1.52
  text "2" at -107.823,-105.41 h1.52
  text "2,000mm (78,74mil)" at -90.099,-105.41 h1.52
  text "PTH" at -55.92,-105.41 h1.52
  text "Round" at -43.071,-105.41 h1.52
  text "3" at -107.823,-109.22 h1.52
  text "1,000mm (39,37mil)" at -90.099,-109.22 h1.52
  text "NPTH" at -55.92,-109.22 h1.52
  text "Round" at -43.071,-109.22 h1.52
  text "3" at -107.823,-113.03 h1.52
  text "1,200mm (47,23mil)" at -90.099,-113.03 h1.52
  text "PTH" at -55.92,-113.03 h1.52
  text "Round" at -43.071,-113.03 h1.52
  text "4" at -107.823,-116.84 h1.52
  text "1,600mm (62,99mil)" at -90.099,-116.84 h1.52
  text "PTH" at -55.92,-116.84 h1.52
  text "Round" at -43.071,-116.84 h1.52
  text "4" at -107.823,-120.65 h1.52
  text "2,300mm (90,55mil)" at -90.099,-120.65 h1.52
  text "NPTH" at -55.92,-120.65 h1.52
  text "Round" at -43.071,-120.65 h1.52
  text "4" at -107.823,-124.46 h1.52
  text "4,200mm (165,35mil)" at -90.099,-124.46 h1.52
  text "PTH" at -55.92,-124.46 h1.52
  text "Round" at -43.071,-124.46 h1.52
  text "6" at -107.823,-128.27 h1.52
  text "1,000mm (39,37mil)" at -90.099,-128.27 h1.52
  text "PTH" at -55.92,-128.27 h1.52
  text "Round" at -43.071,-128.27 h1.52
  text "PLAN DE DETOURAGE ET PERCAGE" at 162.606,-131.368 h4
  text "10" at -107.823,-132.08 h1.52
  text "1,300mm (51,18mil)" at -90.099,-132.08 h1.52
  text "PTH" at -55.92,-132.08 h1.52
  text "Round" at -43.071,-132.08 h1.52
  text "15" at -107.823,-135.89 h1.52
  text "1,500mm (59,06mil)" at -90.099,-135.89 h1.52
  text "PTH" at -55.92,-135.89 h1.52
  text "Round" at -43.071,-135.89 h1.52
  text "57" at -107.823,-139.7 h1.52
  text "0,600mm (23,62mil)" at -90.099,-139.7 h1.52
  text "PTH" at -55.92,-139.7 h1.52
  text "Round" at -43.071,-139.7 h1.52
  text "110 Total" at -107.823,-143.51 h1.52

## Dimensions
0,99.2 to 35.5,98.2 on Drill Drawing
0,99.2 to 35.5,99.2 on Drill Drawing
35.5,98.2 to 46.5,98.2 on Drill Drawing
0,99.2 to 82,99.2 on Drill Drawing
0,0 to 1,48.6 on Drill Drawing
1,48.6 to 0,50.6 on Drill Drawing
81.996,0 to 82,99.2 on Drill Drawing
0,50.6 to 1,48.6 on Drill Drawing

## Text inside footprints (layer, text, board x,y; h text height)
P1: Top Overlay "7" at 1.503,55.639 h2.5 r270; Top Overlay "1" at 1.63,96.279 h2.5 r270; Cablage Top "1" at 1.651,96.266 h2.5 r270; Cablage Top "7" at 1.524,55.626 h2.5 r270
P2: Top Overlay "1" at 1.503,45.987 h1.2 r270; Top Overlay "8" at 4.191,1.778 h1.2 r270
P5: Top Overlay "1" at 53.578,36.83 h1.3 r180; Cablage Top "1" at 53.578,36.83 h1.3 r180
P6: Top Overlay "1" at 71.696,33.366 h1.2 r180
P8: Top Overlay "1" at 77.216,44.381 h1.3 r180; Cablage Top "1" at 77.216,44.381 h1.3 r180
P10: Top Overlay "1" at 61.595,55.626 h2.5; Top Overlay "8" at 61.468,68.326 h2.5; Cablage Top "1" at 61.595,55.626 h2.5; Cablage Top "8" at 61.468,68.326 h2.5
P11: Top Overlay "8" at 61.468,91.567 h2.5; Top Overlay "1" at 61.722,78.74 h2.5; Cablage Top "8" at 62.298,92.977 h2.5 r180; Cablage Top "1" at 62.542,80.06 h2.5 r180